# Altium PCB Copy of MB1363.PcbDoc (part 3 of 6)
Units mm, origin at the board's own origin, x right, y up, seen from the top; angles counter-clockwise.
Board outline 60.78 x 109.88 mm, 4 copper layers (Top Layer, Signal Layer 1, Signal Layer 2, Bottom Layer), stack 0.453 mm thick; 231 components, 215 nets, 716 pads, 2915 vias.
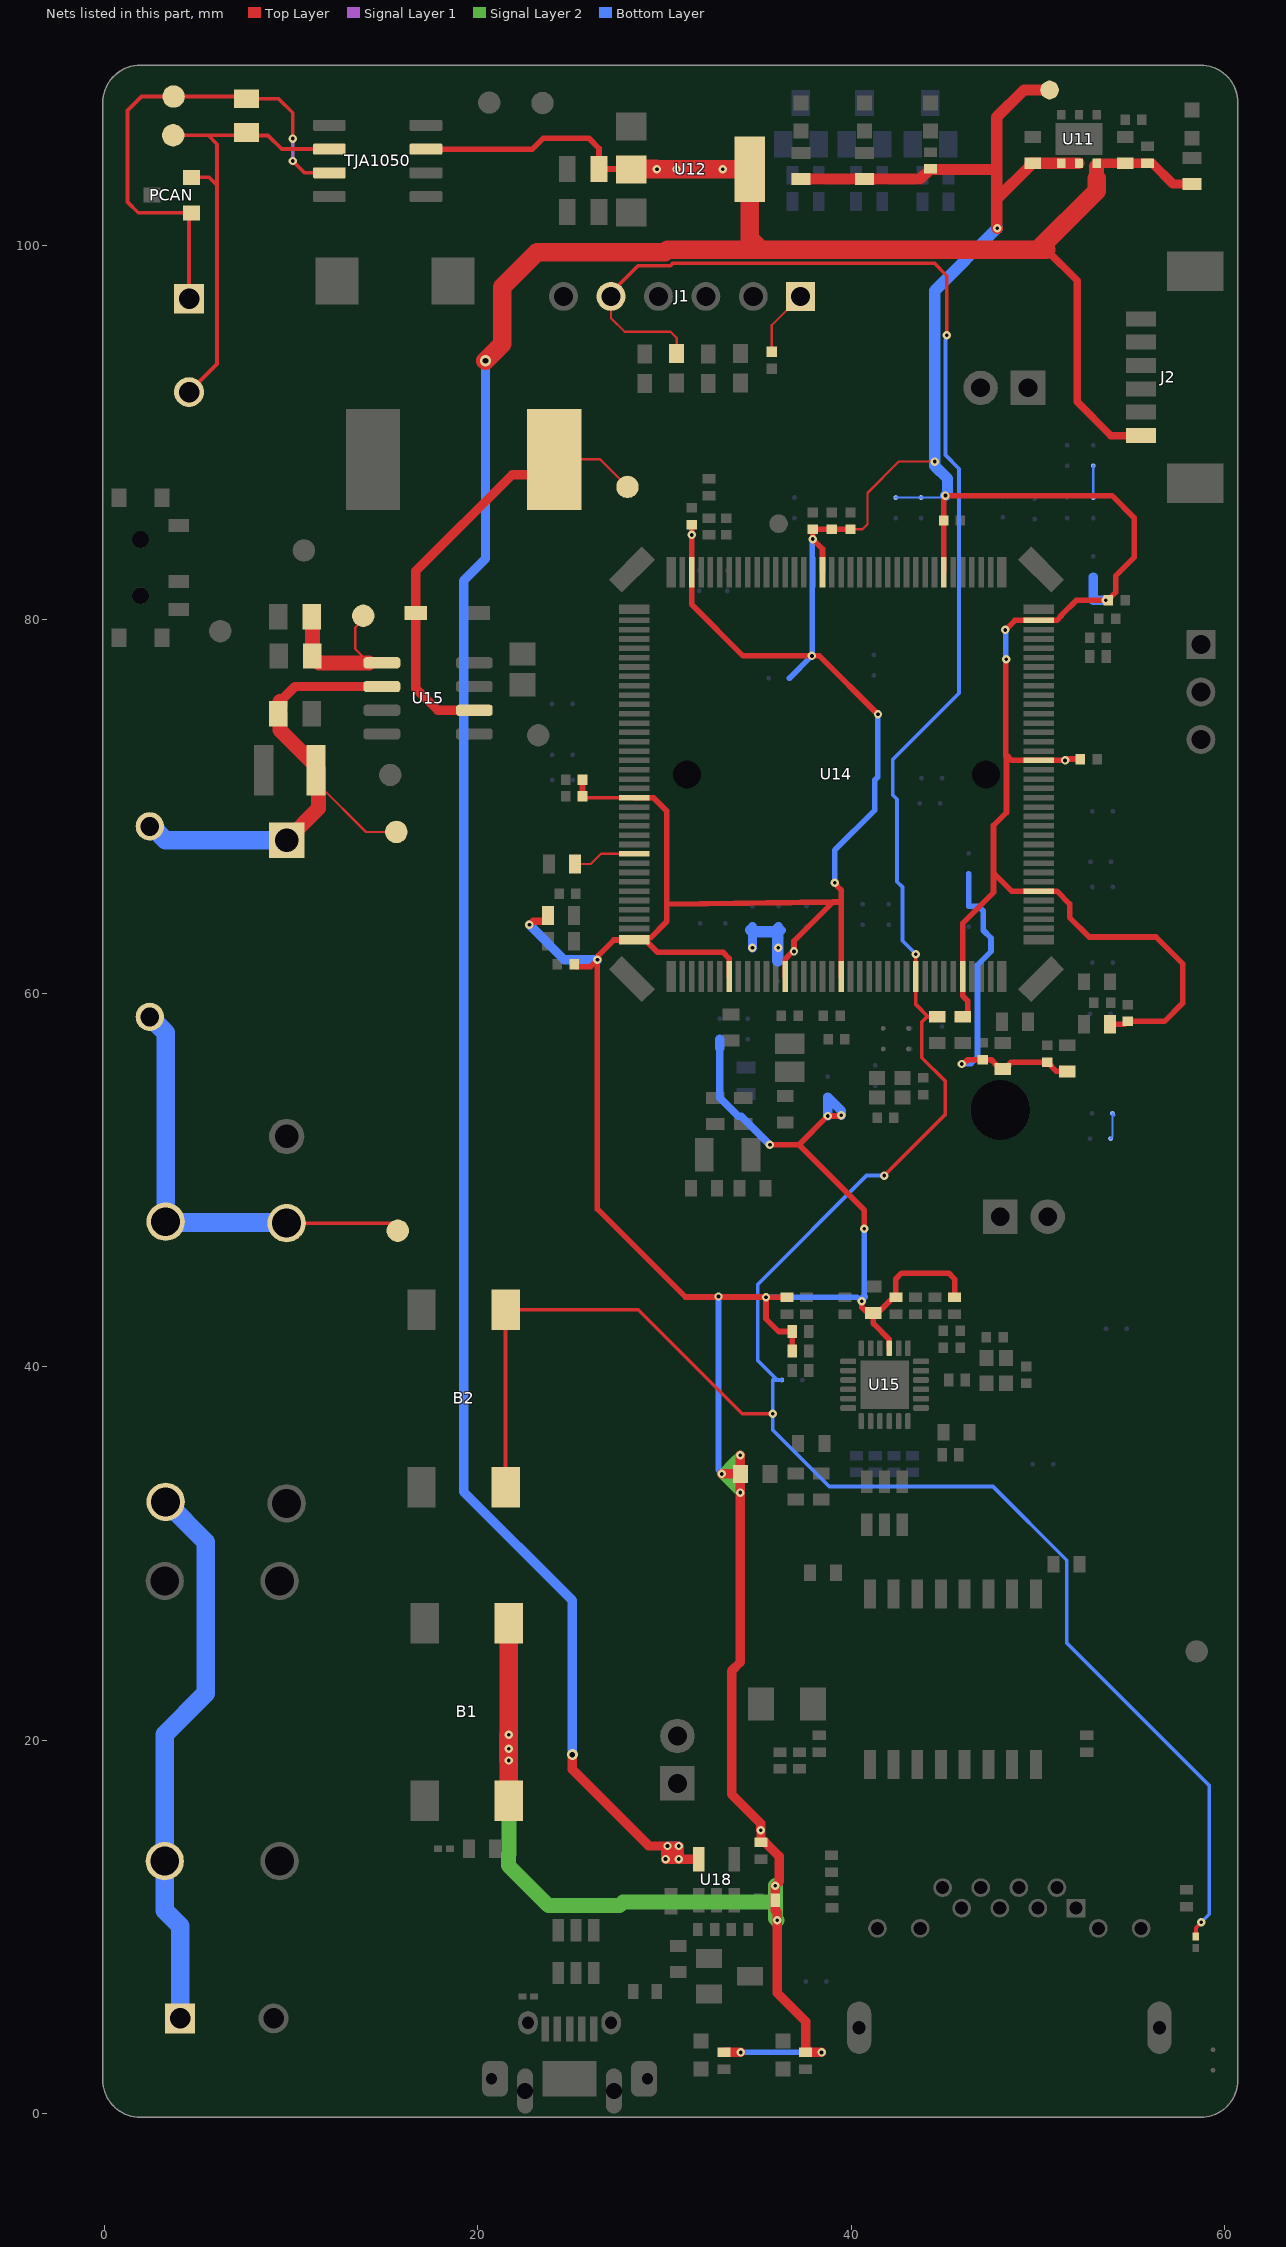
[diagram p4: the nets of this part, all layers, seen from the top]

## Via types
v1: diameter 0.45, hole 0.2, Top Layer to Bottom Layer, tented both sides, 2902 vias
v2: diameter 0.6, hole 0.3, Top Layer to Bottom Layer, tented both sides, 13 vias

## Nets (pads, with @x,y where several pads share a name; then routed paths per layer and width w, separated by ;. In a path a pad name is that pad's centre, name@x,y a point inside that pad or via, vN(x,y) a via of type N, cw(c..) or ccw(c..) an arc to the next point about the centre after c; other vN are vias at no path point) (continued)
5V: (continued)
  Top Layer w1: v2(20.425,93.85) 21.325,94.75 21.325,97.8 23.18,99.655 30.023,99.655 30.168,99.8 35.161,99.8 ; U12.2@28.245,104.12 v1@29.58,104.12 ; v1(29.6,104.1) v1(30.65,104.1) v1(33.125,104.1) U12.4@34.575,104.1 34.575,100.386 35.161,99.8 ; 50.45,99.8 50,99.8 ; 53.142,103.592 53.142,102.942 50,99.8 ; 35.161,99.8 50,99.8
  Bottom Layer w0.5: v2(20.425,93.85) 20.425,83.25 19.25,82.075 19.25,33.3 25.075,27.475 v2(25.075,19.225) ; v1(30.166,14.329) 30.066,14.229 v1(30.066,13.629) v1(30.766,13.629) v1@30.766,13.754 ; v1@30.766,13.754 30.191,14.329 v1(30.766,14.329) v1@30.766,13.754
12v_IN: 12V.1 C1.2 DP5.C F1.2 R3.2 U15.6@14.875,76.41 | length 27.6
  Top Layer w0.12: C1.2@11.475,71.175 14.025,68.625 12V.1@15.65,68.625
  Top Layer w0.5: R3.2@9.425,75.616 9.516,75.616 9.575,75.675 9.575,75.766 10.219,76.41 U15.6@14.875,76.41
  Top Layer w0.8: R3.2@9.325,75.075 9.425,74.975 9.425,74.075 11.475,72.025 11.475,71.175 11.475,69.88 DP5.C@9.775,68.18 ; R3.2@9.325,75.25 9.425,75.35 R3.2@9.425,75.616
  Bottom Layer w1: F1.2@2.45,68.925 2.548,68.925 3.293,68.18 DP5.C@9.775,68.18
12v_INPUT: 12VBAT.1 DP1.1 DP2.1 F1.1 | length 23.9
  Top Layer w0.2: DP2.1@9.775,47.68 15.32,47.68 12VBAT.1@15.725,47.275
  Bottom Layer w1: F1.1@2.45,58.725 3.3,57.875 DP1.1@3.3,47.755 3.338,47.718 9.738,47.718 DP2.1@9.775,47.68
+VSYS: C4.1 J1.1 | length 3.6
  Top Layer w0.12: C4.1@35.75,94.327 35.75,95.75 J1.1@37.3,97.3
AGND: C69.2 C71.1 C72.2 C73.1 SB61.2 SB68.1 | length 18.3
  Top Layer w0.3: v1(45.925,56.2) 46.014,56.2 46.243,56.429 C71.1@47.041,56.429 47.501,56.429 47.731,56.199 47.731,56.189 47.991,55.929 48.241,55.929 48.501,56.189 48.501,56.234 48.571,56.304 50.516,56.304 50.711,56.109 50.711,56.084 50.991,55.804 C72.2@51.566,55.804
  Bottom Layer w0.3: v1(45.925,56.2) 45.954,56.229 46.416,56.229 46.766,56.579 46.766,61.504 47.491,62.229 47.491,62.948 47.075,63.363 47.075,64.401 46.823,64.654 SB68.1@46.291,64.654 SB61.2@46.291,66.379
ARD_D0_RX: SB94.2 SB96.1 | length 1.5
  Bottom Layer w0.12: SB96.1@53.891,52.204 53.991,52.304 SB94.2@53.991,53.554 54.091,53.454
ARD_D1_TX: SB11.1 SB15.2 | length 1.7
  Bottom Layer w0.12: SB15.2@52.966,86.529 SB11.1@52.966,88.229
BOOT0: R36.1 U14.135 | length 3.4
  Top Layer w0.12: R36.1@25.216,66.904 26.056,66.904 26.606,67.454 U14.135@28.391,67.454
CANH: CAN.1 PCAN.1 Rcan.2 TJA1050.7 TP_CH.1 | length 27.6
  Top Layer w0.2: CAN.1@4.55,97.175 4.55,101.65 PCAN.1@4.675,101.775 1.825,101.775 1.25,102.35 1.25,107.25 2,108 TP_CH.1@3.725,108 7.5,108 Rcan.2@7.625,107.875 9.35,107.875 10.097,107.128 10.097,105.753 v1(10.1,105.75) ; v1@10.085,104.565 v1(10.1,104.55) 10.735,103.915 TJA1050.7@12.065,103.915
  Signal Layer 1 w0.12: v1@10.085,104.565 v1@10.1,104.58
  Signal Layer 1 w0.2: v1@10.1,104.58 v1(10.1,105.75)
CANL: CAN.2 PCAN.2 Rcan.1 TJA1050.6 TP_CL.1 | length 24.9
  Top Layer w0.2: TP_CL.1@3.7,105.925 5.575,105.925 ; CAN.2@4.55,92.175 6.05,93.675 6.05,103.25 ; PCAN.2@4.675,103.675 5.625,103.675 6.05,103.25 ; TJA1050.6@12.065,105.185 9.515,105.185 8.783,105.917 7.783,105.917 Rcan.1@7.625,106.075 7.475,105.925 5.575,105.925 ; 5.575,105.925 6.05,105.45 6.05,103.25
Car_Battery_Input: DP1.2 DP3.1 PWR.1 | length 29.8
  Bottom Layer w1: DP1.2@3.3,32.755 5.45,30.605 5.45,22.5 3.25,20.3 3.25,10.875 4.075,10.05 PWR.1@4.075,5.1
COMP_INVERT_INPUT: R1.1 R2.1 TP?.1 U15.5@14.875,77.68 | length 9
  Top Layer w0.12: TP?.1@13.875,80.2 13.875,79.997 13.45,79.572 13.45,78.42 14.19,77.68 U15.5@14.875,77.68
  Top Layer w0.8: R1.1@11.125,80.15 11.15,80.125 R2.1@11.15,78.05 11.52,77.68 U15.5@14.19,77.68
CPU_RST: B2.1 B2.2 C66.2 D3.1 J1.5 SB98.1 U14.27 U20.1 | length 164.3
  Top Layer w0.12: J1.5@27.14,97.3 27.14,96.135 27.875,95.4 30.325,95.4 30.658,95.067 D3.1@30.658,94.232
  Top Layer w0.2: B2.2@21.498,33.547 B2.1@21.498,43.047 28.603,43.047 34.175,37.475 v1(35.8,37.475) ; J1.5@27.2,97.55 28.585,98.935 30.321,98.935 30.466,99.08 44.445,99.08 45.12,98.405 v1(45.12,95.225) ; v1(41.775,50.225) 45.041,53.491 45.041,55.284 43.786,56.539 43.786,58.449 44.066,58.729 ; v1(43.466,62.079) U14.27@43.466,60.879 43.466,59.379 44.116,58.729 C66.2@44.616,58.729 ; U20.1@58.45,9.488 58.469,9.507 58.469,9.958 58.75,10.239 v1(58.75,10.25)
  Bottom Layer w0.2: SB98.1@36.291,39.279 36.046,39.279 ; v1(41.775,50.225) 40.825,50.225 34.994,44.394 34.994,40.33 36.046,39.279 ; v1(43.466,62.079) 42.746,62.799 42.746,65.674 42.457,65.963 42.457,70.37 42.223,70.604 42.223,72.498 45.775,76.05 45.775,88.075 45.05,88.8 45.05,94.983 45.072,95.005 45.072,95.177 v1(45.12,95.225) ; v1(58.75,10.25) 59.175,10.675 59.175,17.575 57.545,19.205 57.541,19.205 51.55,25.196 51.55,29.625 47.6,33.575 38.825,33.575 35.8,36.6 v1(35.8,37.475) 35.8,39.279 36.046,39.279
EMITTER: D6.C L?.2 TP3.1 U15.2@19.825,75.14 | length 24.3
  Top Layer w0.12: L?.2@24.1,88.575 26.55,88.575 TP3.1@28.025,87.1
  Top Layer w0.5: U15.2@19.825,75.14 17.86,75.14 16.695,76.305 D6.C@16.695,80.35 16.695,82.595 21.85,87.75 23.275,87.75 L?.2@24.1,88.575